# EAGLE board Current (EAGLE 7.5.0)
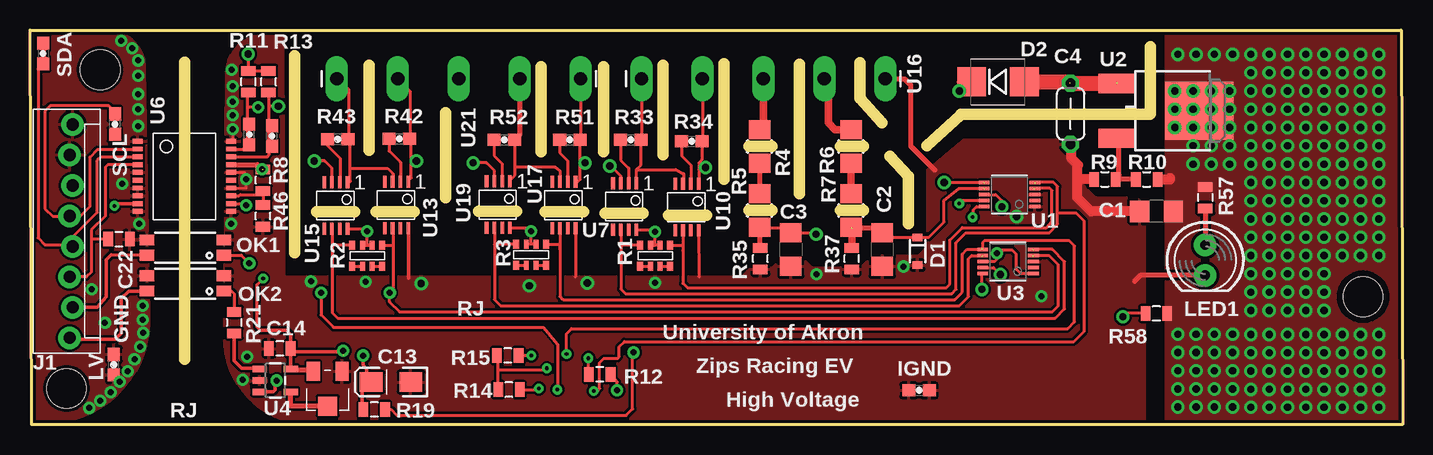
[diagram p0: board, top side]
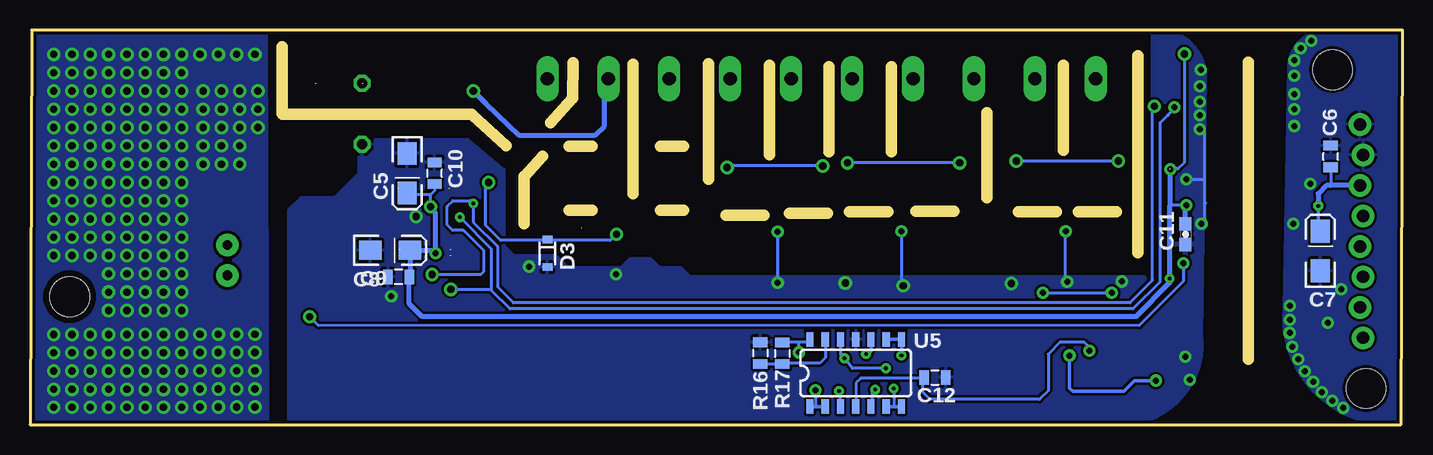
[diagram p1: board, bottom side, seen from below]

Size 114.43 x 32.89 mm. Coordinates in mm from the lower left corner, seen from the top.
Outline: 12.88,30.23 12.88,5.46
Outline: 23.88,17.73 27.05,17.73
Outline: 28.85,17.75 32.03,17.75
Outline: 37.39,17.78 40.56,17.78
Outline: 42.93,17.75 46.13,17.75
Outline: 47.93,17.63 51.1,17.63
Outline: 53.24,17.48 56.41,17.48
Outline: 28.27,22.86 28.27,29.97
Outline: 34.65,18.9 34.65,26.01
Outline: 42.62,22.73 42.62,29.84
Outline: 47.83,22.73 47.83,29.84
Outline: 52.78,22.48 52.78,29.97
Outline: 57.86,20.45 57.86,30.1
Outline: 61.85,23.19 59.94,23.19
Outline: 61.85,17.86 59.94,17.86
Outline: 69.47,23.19 67.56,23.19
Outline: 69.47,17.86 67.56,17.86
Outline: 22.07,14.35 22.07,30.73
Outline: 93.34,25.86 77.6,25.86
Outline: 93.4,31.5 93.4,25.91
Outline: 74.75,23.24 77.55,25.78
Outline: 64.16,19.24 64.16,30.05
Outline: 73.23,16.76 73.23,20.7
Outline: 73.22,20.71 71.69,22.36
Outline: 71.03,25.16 69.23,27.16
Outline: 69.18,30.16 69.2,27.22
Outline: 114.3,32.89 114.43,0 0.13,0 0,32.89 114.3,32.89
Copper layers (1*16): Top 0.035mm / dielectric 1.5mm / Bottom 0.035mm
Design rules "SparkFun *": minimum track width 7mil, minimum drill 12mil, track to track 8mil, track to pad 8mil, pad to pad 8mil, via to via 8mil, smd to smd 8mil, copper to edge 10mil, drill to drill 8mil, minimum pad ring 12mil, minimum via ring 10mil, stop-mask expansion 4mil, vias tented up to drill 25mil, thermal gap 10mil

## Footprints (pad centres in the part's own frame; a part is rotated, then mirrored left to right if it is on the bottom)
1206@1 = smd 1.6 x 1.8: 1 -1.4,0; 2 1.4,0
C_TH_05-02 = drill 0.813 octagon: 1 -2.54,0; 2 2.54,0
EIA3216-16V = smd 1.9 x 1.6: A 1.65,0; C -1.65,0
0805 = smd 0.8 x 1.2: 1 -0.9,0; 2 0.9,0
0603 = smd 1.1 x 1: 1 -0.85,0; 2 0.85,0
SOD-323 = smd 0.63 x 0.83: A 1.15,0; C -1.15,0
SMB = smd 2.4 x 2.4: A 2.2,0; C -2.2,0
MOLEX-1X8-2 = drill 1.016 pad 1.88: 1 -8.89,0; 2 -6.35,-0.254; 3 -3.81,0; 4 -1.27,-0.254; 5 1.27,0; 6 3.81,-0.254; 7 6.35,0; 8 8.89,-0.254
LED5MM = drill 0.813 pad 1.88: A -1.27,0; K 1.27,0
SOP-4 = smd 1.2 x 0.9: 1 -3.2,0.67; 2 -3.2,-0.6; 3 3.2,-0.6; 4 3.2,0.67
22AR100KLFTR = smd 1.092 x 1.6: 1 1.194,-1.448; 3 -1.194,-1.448 | smd 1.6 x 1.6: 2 0,1.448
MNR14 = smd 0.5 x 0.75: 1 -1.25,-0.9; 4 1.25,-0.9; 5 1.25,0.85; 8 -1.25,0.85 | smd 0.4 x 0.75: 2 -0.4,-0.9; 3 0.4,-0.9; 6 0.4,0.85; 7 -0.4,0.85
1206 = smd 1.6 x 1.8: 1 -1.4,0; 2 1.4,0
STAND-OFF = hole 3.302: 0,0
MSOP-10 = smd 0.305 x 0.889: 1 -1,-2.11; 2 -0.5,-2.11; 3 0,-2.11; 4 0.5,-2.11; 5 1,-2.11; 6 1,2.11; 7 0.5,2.11; 8 0,2.11; 9 -0.5,2.11; 10 -1,2.11
DPAK = smd 1.6 x 3: 1 -2.28,-4.04; 3 2.28,-4.04 | smd 4.826 x 5.715: 2 0,2.858
SOT23-5 = smd 0.55 x 1.2: 1 -0.95,-1.3; 2 0,-1.3; 3 0.95,-1.3; 4 0.95,1.3; 5 -0.95,1.3
SO-14 = smd 0.6 x 1.2: 1 -3.81,-2.8; 2 -2.54,-2.8; 3 -1.27,-2.8; 4 0,-2.8; 5 1.27,-2.8; 6 2.54,-2.8; 7 3.81,-2.8; 8 3.81,2.8; 9 2.54,2.8; 10 1.27,2.8; 11 0,2.8; 12 -1.27,2.8; 13 -2.54,2.8; 14 -3.81,2.8
SSOP-20 = smd 0.813 x 0.406: 1 -3.9,2.925; 2 -3.9,2.275; 3 -3.9,1.625; 4 -3.9,0.975; 5 -3.9,0.325; 6 -3.9,-0.325; 7 -3.9,-0.975; 8 -3.9,-1.625; 9 -3.9,-2.275; 10 -3.9,-2.925; 11 3.9,-2.925; 12 3.9,-2.275; 13 3.9,-1.625; 14 3.9,-0.975; 15 3.9,-0.325; 16 3.9,0.325; 17 3.9,0.975; 18 3.9,1.625; 19 3.9,2.275; 20 3.9,2.925
MSOP-8 = smd 0.3 x 1: 1 -0.975,-1.95; 2 -0.325,-1.95; 3 0.325,-1.95; 4 0.975,-1.95; 5 0.975,1.925; 6 0.325,1.925; 7 -0.325,1.925; 8 -0.975,1.925
1X9_0.1_SP = drill 1.118 pad 1.88 long: 1 -10.16,0; 3 -5.08,0; 5 0,0; 7 5.08,0; 9 10.16,0

## Placement (x,y rotation side)
C1  10UF  [1206@1]  93.9,17.78 180 top
C2  10UF  [1206@1]  71.04,14.61 270 top
C3  10UF  [1206@1]  63.42,14.61 270 top
C4  0.47UF  [C_TH_05-02]  86.74,25.91 270 top
C5  10UF  [EIA3216-16V]  82.98,20.95 270 bottom
C6  0.1UF  [0805]  5.99,22.35 90 bottom
C7  10UF  [EIA3216-16V]  6.86,14.48 90 bottom
C8  0.1UF  [0805]  83.69,12.32 180 bottom
C9  10UF  [EIA3216-16V]  84.4,14.53 0 bottom
C10  0.1UF  [0805]  80.7,20.95 90 bottom
C11  0.01UF  [0603]  18.1,15.88 270 bottom
C12  0.1UF  [0805]  38.99,3.94 0 bottom
C13  10UF  [EIA3216-16V]  30.1,3.56 180 top
C14  0.1UF  [0805]  20.83,6.35 180 top
C22  0.1UF  [0805]  7.42,15.47 0 top
D1  3.3V  [SOD-323]  73.99,14.45 270 top
D2  DIODE-ZENER_56V  [SMB]  80.7,28.57 0 top
D3  3.3V  [SOD-323]  71.3,14.27 270 bottom
GND  TPSMD  [0603]  6.99,5 90 top
IGND  TPSMD  [0603]  74.12,2.87 0 top
ISCL  TPSMD  [0603]  18.29,24.18 90 top
ISDA  TPSMD  [0603]  20.17,24.05 90 top
J1  M80022232081-2  [MOLEX-1X8-2]  3.3,16.13 90 top
LED1  [LED5MM]  97.97,13.72 270 top
OK1  TCMT1103  [SOP-4]  12.95,14.8 180 top
OK2  TCMT1103  [SOP-4]  12.95,11.81 180 top
POT1  22AR100KLFTR  [22AR100KLFTR]  24.82,3 180 top
R1  100K  [MNR14]  52.12,14.1 0 top
R2  100K  [MNR14]  28.12,14.1 0 top
R3  100K  [MNR14]  41.78,14.2 0 top
R4  174k  [1206]  60.83,23.18 90 top
R5  174k  [1206]  60.83,17.84 90 top
R6  174k  [1206]  68.45,23.18 90 top
R7  174k  [1206]  68.45,17.84 90 top
R8  30.9K  [0805]  19.43,20.38 90 top
R9  18.2K  [0805]  89.6,20.45 0 top
R10  6.04k  [0805]  93.09,20.45 0 top
R11  2.2K  [0805]  18.21,28.57 90 top
R12  1K  [0805]  47.5,4.19 180 top
R13  2.2K  [0805]  19.89,28.57 90 top
R14  1K  [0805]  39.93,2.92 180 top
R15  1K  [0805]  39.83,5.77 180 top
R16  1K  [0805]  53.54,5.97 270 bottom
R17  2.2K  [0805]  51.71,5.94 270 bottom
R19  10K  [0805]  28.7,1.27 180 top
R21  1K  [0805]  17.02,8.51 270 top
R33  4.99K  [0603]  50.09,23.75 0 top
R34  4.99K  [0603]  55.17,23.62 0 top
R35  2.2K  [0805]  60.88,13.84 90 top
R37  2.2K  [0805]  68.5,13.84 90 top
R42  4.99K  [0603]  30.78,23.83 0 top
R43  4.99K  [0603]  25.65,23.8 0 top
R46  10K  [0805]  19.43,17.4 90 top
R51  4.99K  [0603]  45.01,23.75 0 top
R52  4.99K  [0603]  39.55,23.75 0 top
R57  1K  [0805]  97.97,18.92 270 top
R58  1K  [0805]  93.9,9.27 180 top
SCL  TPSMD  [0603]  7.09,25.04 90 top
SDA  TPSMD  [0603]  1.09,30.94 270 top
STANDOFF1  STAND-OFF  [STAND-OFF]  5.84,29.59 0 top
STANDOFF2  STAND-OFF  [STAND-OFF]  111.12,10.67 0 top
STANDOFF3  STAND-OFF  [STAND-OFF]  3.05,3.02 0 top
U1  ADS1015  [MSOP-10]  81.66,19.18 90 top
U2  LR8  [DPAK]  94.61,26.16 270 top
U3  ADS1015  [MSOP-10]  81.53,13.59 90 top
U4  OPA344  [SOT23-5]  20.45,3.68 270 top
U5  MCP6L04  [SO-14]  45.59,4.32 0 bottom
U6  ADM3260ARSZ-RL7  [SSOP-20]  12.88,20.7 0 top
U7  HV7802  [MSOP-8]  49.58,18.19 180 top
U10  HV7802  [MSOP-8]  54.76,18.11 180 top
U13  HV7802  [MSOP-8]  30.56,18.31 180 top
U15  HV7802  [MSOP-8]  25.5,18.26 180 top
U16  M5_0.2_ISO  [1X9_0.1_SP]  61.14,28.83 0 top
U17  HV7802  [MSOP-8]  44.5,18.29 180 top
U19  HV7802  [MSOP-8]  39.04,18.34 180 top
U21  M5_0.2_ISO  [1X9_0.1_SP]  35.74,28.83 180 top
U$2  LOGO16-M  [2016-LOGO-M]  77.72,1.27 0 top

## Library data of the parts
C1-C3 = FSAE Electric; PARTNO: CL31A106KBHNNNE
C4 = FSAE Electric; PARTNO: RDER72J474MUE1H03A
C5 C7 C9 C13 = FSAE Electric; PARTNO: T491A106M016AT
C6 C8 C10 C12 C14 C22 = FSAE Electric; PARTNO: CC0805ZRY5V9BB104
C11 = FSAE Electric; PARTNO: CC0603KRX7R9BB103
D1 D3 = SparkFun-DiscreteSemi; PROD_ID: DIO-11284
D2 = FSAE Electric; PARTNO: 1SMB5943B-13
GND IGND ISCL ISDA SCL SDA = FSAE Electric; PARTNO: 1625854-3
J1 = FSAE Electric; PARTNO: 0022232081
LED1 = SparkFun-LED
OK1 OK2 = FSAE Electric; PARTNO: TCMT1103
POT1 = FSAE Electric; PARTNO: 22AR100KLFTR
R1-R3 = FSAE Electric; PARTNO: MNR14ERAPJ104
R4-R7 = FSAE Electric; PARTNO: RC1206FR-07174KL
R8 = FSAE Electric; PARTNO: ERJ-6ENF3092V
R9 = FSAE Electric; PARTNO: RC0805FR-0718K2L
R10 = FSAE Electric; PARTNO: RMCF0805FT6K04
R11 R13 R17 R35 R37 = FSAE Electric; PARTNO: RC0805FR-072K2L
R12 R14-R16 R21 R57 R58 = FSAE Electric; PARTNO: RC0805FR-071KL
R19 R46 = FSAE Electric; PARTNO: RC0805FR-0710KL
R33 R34 R42 R43 R51 R52 = FSAE Electric; PARTNO: ERJ-3EKF4991V
STANDOFF1-STANDOFF3 = SparkFun-Electromechanical
U1 U3 = FSAE Electric; PARTNO: ADS1015QDGSRQ1
U2 = FSAE Electric; PARTNO: LR8K4-G
U4 = FSAE Electric; PARTNO: OPA344NA/3K
U5 = FSAE Electric; PARTNO: MCP6L04T-E/SL
U6 = FSAE Electric; PARTNO: ADM3260ARSZ-RL7
U7 U10 U13 U15 U17 U19 = FSAE Electric; PARTNO: HV7802MG-G
U16 U21 = FSAE Electric
U$2 = Pic

## Nets
5V: C1.1 R10.2 R57.1 R58.1 U2.2
+3V3: C22.1 J1.3 U6.4
+5V: C6.1 C7.A J1.6 U6.9
CRNT1A: R1.8 U1.5 U5.3 U7.6
CRNT1B: R1.5 U1.4 U10.6
CRNT2A: R2.5 U3.4 U5.5 U13.6
CRNT2B: R2.8 U3.5 U15.6
CRNT3A: R3.5 U3.6 U5.10 U17.6
CRNT3B: R3.8 U3.7 U19.6
GND: C6.2 C7.C C22.2 GND.1 GND.2 J1.7 J1.8 OK1.3 OK2.3 U6.1 U6.5 U6.7 U6.8 U6.10
HV+: C4.1 D2.A U2.1
N$1: R3.3 R3.4
N$2: R3.1 R3.2
N$3: R2.3 R2.4
N$4: R2.1 R2.2
N$5: R1.1 R1.2
N$6: R1.3 R1.4
N$7: J1.4 SDA.1 SDA.2 U6.3
N$8: J1.5 SCL.1 SCL.2 U6.2
N$9: R4.1 R5.2
N$10: R6.1 R7.2
N$11: R12.2 R14.2 R15.2 U5.12
N$12: R16.2 R17.2 U5.13
N$13: R17.1 R19.1 U5.14
N$14: C13.A R19.2 U4.3
N$15: OK2.1 R21.1
N$16: R15.1 U5.8 U5.9
N$17: R14.1 U5.6 U5.7
N$18: POT1.2 U4.4
N$19: R21.2 U4.1
N$21: R12.1 U5.1 U5.2
N$22: J1.1 OK2.4
N$23: R9.2 R10.1 U2.3
N$24: C5.A C8.1 C9.A C10.1 C11.1 C12.1 C14.1 POT1.1 R8.2 R11.2 R13.2 U1.8 U3.1 U3.8 U4.5 U5.4 U6.12 U6.17
N$31: D2.C R6.2 U16.7
N$32: R33.2 U7.1 U10.3 U16.1
N$33: C3.1 D3.C R5.1 R35.2 U1.6
N$34: R34.2 U7.3 U10.1 U16.3
N$35: R4.2 U16.5
N$36: R33.1 U7.2
N$37: R34.1 U10.2
N$39: LED1.A R57.2
N$51: R43.2 U13.3 U15.1 U21.9
N$52: R42.1 U13.2
N$53: C2.1 D1.C R7.1 R37.2 U1.7
N$55: R43.1 U15.2
N$56: R42.2 U13.1 U15.3 U21.7
N$57: OK1.1 R58.2
N$64: R52.2 U17.3 U19.1 U21.3
N$65: R51.1 U17.2
N$66: R52.1 U19.2
N$67: R51.2 U17.1 U19.3 U21.1
N$71: ISCL.1 ISCL.2 R11.1 U1.10 U3.10 U6.19
N$72: ISDA.1 ISDA.2 R13.1 U1.9 U3.9 U6.18
N$73: R8.1 R46.2 U6.13
TSAL_EN: J1.2 OK1.4
V-: C1.2 C2.2 C3.2 C4.2 C5.C C8.2 C9.C C10.2 C11.2 C12.2 C13.C C14.2 D1.A D3.A IGND.1 IGND.2 LED1.K OK1.2 OK2.2 POT1.3 R1.6 R1.7 R2.6 R2.7 R3.6 R3.7 R9.1 R16.1 R35.1 R37.1 R46.1 U1.1 U1.3 U3.3 U4.2 U5.11 U6.11 U6.14 U6.16 U6.20 U7.8 U10.8 U13.8 U15.8 U16.9 U17.8 U19.8

## Tracks (layer width: path | path; a pad name or v marks a point on that pad's centre or on a via)
5V  (via drill 0.6)
  Top 0.813: R10.2 95.06,20.45 95.06,20.57
  other vias: 95.68,30.86 97.21,30.86 98.73,30.86 100.25,30.86 107.87,9.53 107.87,11.05 107.87,12.57 107.87,14.1 107.87,15.62 107.87,17.14 107.87,18.67 109.4,14.1 109.4,15.62 109.4,17.14 109.4,18.67 112.45,14.1 112.45,15.62 112.45,17.14 112.45,18.67 110.92,14.1 110.92,15.62 110.92,17.14 110.92,18.67 112.45,20.19 112.45,21.72 112.45,23.24 112.45,24.77 110.92,20.19 110.92,21.72 110.92,23.24 110.92,24.77 109.4,20.19 109.4,21.72 109.4,23.24 109.4,24.77 107.87,20.19 107.87,21.72 107.87,23.24 107.87,24.77 106.35,20.19 106.35,21.72 106.35,23.24 106.35,24.77 104.83,20.19 104.83,21.72 104.83,23.24 104.83,24.77 103.3,20.19 103.3,21.72 103.3,23.24 103.3,24.77 101.78,20.19 101.78,21.72 101.78,23.24 101.78,24.77 112.45,26.29 112.45,27.81 112.45,29.34 112.45,30.86 110.92,26.29 110.92,27.81 110.92,29.34 110.92,30.86 109.4,26.29 109.4,27.81 109.4,29.34 109.4,30.86 107.87,26.29 107.87,27.81 107.87,29.34 107.87,30.86 106.35,26.29 106.35,27.81 106.35,29.34 106.35,30.86 104.83,26.29 104.83,27.81 104.83,29.34 104.83,30.86 103.3,26.29 103.3,27.81 103.3,29.34 103.3,30.86 101.78,26.29 101.78,27.81 101.78,29.34 101.78,30.86 101.78,9.53 101.78,11.05 101.78,12.57 101.78,14.1 101.78,15.62 101.78,17.14 101.78,18.67 103.3,14.1 103.3,15.62 103.3,17.14 103.3,18.67 103.3,9.53 103.3,11.05 103.3,12.57 104.83,9.53 104.83,11.05 104.83,12.57 104.83,14.1 104.83,15.62 104.83,17.14 104.83,18.67 106.35,14.1 106.35,15.62 106.35,17.14 106.35,18.67 106.35,9.53 106.35,11.05 106.35,12.57 95.43,27.81 96.95,27.81 98.48,27.81 100,27.81 95.43,26.29 96.95,26.29 98.48,26.29 100,26.29 95.43,24.77 96.95,24.77 98.48,24.77 100,24.77 96.95,23.24 98.48,23.24 100,23.24 96.95,21.72 98.48,21.72 100,21.72 95.68,6.02 95.68,7.54 97.21,6.02 97.21,7.54 95.68,2.97 95.68,4.5 97.21,2.97 97.21,4.5 95.68,1.47 97.21,1.47 98.73,6.02 98.73,7.54 100.25,6.02 100.25,7.54 98.73,2.97 98.73,4.5 100.25,2.97 100.25,4.5 98.73,1.47 100.25,1.47 107.87,2.95 107.87,4.47 109.4,2.95 109.4,4.47 112.45,2.95 112.45,4.47 110.92,2.95 110.92,4.47 101.78,2.95 101.78,4.47 103.3,2.95 103.3,4.47 104.83,2.95 104.83,4.47 106.35,2.95 106.35,4.47 107.87,5.99 107.87,7.52 109.4,5.99 109.4,7.52 112.45,5.99 112.45,7.52 110.92,5.99 110.92,7.52 101.78,5.99 101.78,7.52 103.3,5.99 103.3,7.52 104.83,5.99 104.83,7.52 106.35,5.99 106.35,7.52 107.87,1.45 109.4,1.45 112.45,1.45 110.92,1.45 101.78,1.45 103.3,1.45 104.83,1.45 106.35,1.45
  pour Top (isolate 0.254, no thermals): 94.79,32.64 114.3,32.89 114.3,0 94.79,0
  pour Bottom (isolate 0.254): 94.79,32.64 114.3,32.89 114.17,0 94.67,0
+3V3
  Top 0.254: U6.4 6.49,21.68 6.27,21.46 6.27,17.37 5.11,16.23 5.11,15.42 | 5.11,15.42 5.11,12.73 4.7,12.32 J1.3 | C22.1 5.16,15.47 5.11,15.42
+5V  (via drill 0.3)
  Top 0.305: U6.9 7.22,18.43 v7.04,18.24
  Top 0.406: 7.06,18.26 v7.04,18.24
  Bottom 0.254: C6.1 5.99,19.99 6.04,19.94
  Bottom 0.305: v7.04,18.24 7.04,16.71 C7.A
  Bottom 0.406: J1.6 6.04,19.94 6.35,19.94 7.04,19.25 v7.04,18.24
CRNT1A  (via drill 0.3)  (1 unrouted)
  Top 0.254: 85.65,17.58 85.65,16.71 84.96,15.98 78,15.98 77.19,15.16 77.19,11.28 76.83,10.92 49.63,10.92 49.26,11.3 49.26,14.96 | 85.65,17.58 85.65,19.86 85.32,20.19 83.71,20.19 | v46.99,2.82 47.3,2.82 47.5,3.02 47.5,5.18 47.85,5.54 49,5.54 49.12,5.66 49.12,6.5 49.55,6.93 87.02,6.91 87.88,7.77 87.88,16.97 87.25,17.6 85.67,17.6 85.65,17.58 | U7.6 49.26,14.96 | R1.8 49.27,14.95 49.26,14.96
  Bottom 0.254: U5.3 46.86,2.69 v46.99,2.82
CRNT1B  (1 unrouted)
  Top 0.254: 54.44,14.53 U10.6 54.45,14.89 | 54.45,14.89 54.44,11.78 54.81,11.41 76.38,11.41 76.68,11.71 76.68,15.39 77.72,16.43 84.73,16.43 85.19,16.94 85.19,19.53 85.04,19.68 83.7,19.68 | R1.5 54.38,14.95 54.45,14.89
CRNT2A  (via drill 0.3, 0.5)  (1 unrouted)
  Top 0.254: U13.6 30.28,15.96 30.28,14.93 | 83.58,14.1 84.96,14.1 85.72,13.34 85.72,9.91 85.22,9.4 30.81,9.4 30,10.21 v30,11 30.28,11.28 30.28,14.93 | v24.26,11 24.26,9.14 25.3,8.1 42.8,8.1 43.97,6.71 v43.97,2.92 | R2.5 30.27,14.95 30.28,14.93
  Bottom 0.254: v30,11 v24.26,11 | v43.97,2.92 44.22,2.67 44.22,1.62 U5.5
CRNT2B  (1 unrouted)
  Top 0.254: U15.6 25.2,15.96 25.2,14.91 | 83.58,14.61 85.22,14.61 86.23,13.59 86.23,9.65 85.47,8.89 25.63,8.89 25.2,9.32 25.2,14.91 | R2.8 25.23,14.95 25.2,14.91
CRNT3A  (via drill 0.3)  (1 unrouted)
  Top 0.254: U17.6 44.18,14.59 | 44.18,14.59 44.17,14.99 43.23,14.99 R3.5 | 44.18,14.59 44.18,10.69 44.45,10.41 77.09,10.41 77.72,11.05 77.72,14.22 78.11,14.61 79.33,14.61 | v44.73,5.89 44.73,7.59 45.14,8 86.51,8 87.07,8.56 87.07,14.91 86.64,15.34 79.58,15.34 79.4,15.16 79.4,14.61 U3.6
  Bottom 0.254: U5.10 44.32,6.07 44.5,5.89 v44.73,5.89
CRNT3B  (1 unrouted)
  Top 0.254: 79.34,14.1 78.49,14.1 78.23,13.84 78.23,10.67 77.47,9.91 39.24,9.91 38.72,10.43 38.72,15.01 | U19.6 38.72,15.01 | R3.8 38.75,15.05 38.72,15.01
GND  (via drill 0.5)
  other vias: 9.02,24.89 9.02,26.29 9.02,27.56 9.02,29.08 9.02,30.35 8.51,31.37 7.62,32 9.12,16.74 9.4,9.91 9.4,8.76 9.42,7.65 9.19,6.5 8.71,5.46 8.15,4.47 7.47,3.58 6.73,2.72 5.87,2.01 4.95,1.4 7.7,20.07 6.25,8.48 5.13,11.3
  pour Top: 0,32.89 6.35,32.89 arc-90 9.53,29.72 9.91,9.15 arc-92 1.36,0.12 0,-0.13
  pour Bottom: 0,32.89 6.35,32.89 arc-90 9.53,29.72 9.92,9.65 arc-93 1.26,0.08 -0.13,0
HV+  (2 unrouted)
  Top 1.27: D2.A 86.54,28.57 86.67,28.45 90.66,28.45
N$1
  Top 0.254: R3.3 R3.4
N$2
  Top 0.254: R3.1 R3.2
N$3
  Top 0.254: R2.3 R2.4
N$4
  Top 0.254: R2.1 R2.2
N$5
  Top 0.254: R1.1 R1.2
N$6
  Top 0.254: R1.3 R1.4
N$7
  Top 0.254: U6.3 5.92,22.33 5.61,22.02 5.61,17.7 3.56,15.65 J1.4 3.4,15.01 1.25,15.01 0.69,15.57 0.69,29.64 1.09,30.05 SDA.2
  Top 0.406: SDA.1 SDA.2
N$8
  Top 0.254: U6.2 8.94,22.94 5.64,22.94 5,22.3 5,18.19 4.22,17.4 J1.5 3.28,17.37 1.88,17.37 1.25,18.01 1.25,26.11 1.7,26.57 6.58,26.57 7.06,26.06 SCL.1 SCL.2
N$9
  Top 0.406: R4.1 60.83,19.3 | 60.83,19.3 60.64,19.11 | 60.83,19.3 60.96,19.43 60.96,19.37 R5.2
N$10
  Top 0.61: R6.1 68.45,19.49 68.52,19.43 68.45,19.43 68.33,19.3 68.39,19.3 R7.2
N$11  (via drill 0.3)
  Top 0.254: R15.2 39.03,6.02 R14.2 39.03,4.56 39.01,4.57 42.8,4.57 v43.08,4.7 | v46.53,5.54 46.53,4.16 R12.2
  Bottom 0.254: U5.12 46.86,5.87 v46.53,5.54 45.87,4.7 v43.08,4.7
N$12
  Bottom 0.254: U5.13 48.13,5.59 48.59,5.13 51.37,5.13 R17.2 53.26,5.04 R16.2
N$13  (via drill 0.5)
  Top 0.254: R19.1 30.1,1.27 30.58,0.79 49.71,0.79 50.24,1.32 50.24,5.94 v50.32,6.02
  Bottom 0.254: U5.14 49.4,6.96 49.48,6.88 50.39,6.88 | 50.39,6.88 51.42,6.88 R17.1 | v50.32,6.02 50.32,6.81 50.39,6.88
N$14  (via drill 0.5)
  Top 0.305: U4.3 20.26,2.73 20.45,2.92 20.45,3.56 v20.57,3.68 | R19.2 27.69,1.39 27.69,3.3 27.94,3.56 C13.A 28.07,3.94 28.07,4.57 27.76,5 v27.76,5.77
  Bottom 0.305: v20.57,3.68 22.35,3.68 23.24,2.79 27.51,2.79 27.76,3.05 v27.76,5.77
N$15
  Top 0.254: OK2.1 16.8,11.14 17.02,10.92 R21.1
N$16  (via drill 0.3)
  Top 0.254: v41.78,5.77 R15.1
  Bottom 0.254: U5.8 v41.78,5.77
  Bottom 0.305: U5.8 U5.9
N$17  (via drill 0.3)
  Top 0.254: R14.1 42.32,2.92 v42.42,3.02
  Bottom 0.254: v42.42,3.02 42.42,1.59 42.34,1.52
  Bottom 0.305: U5.7 42.34,1.52 U5.6
N$18
  Top 0.406: POT1.2 21.75,1.55 U4.4
N$19
  Top 0.305: R21.2 17.02,5.33 17.65,4.7 19.08,4.7 U4.1
N$21  (via drill 0.5)
  Top 0.254: v48.95,2.87 48.95,3.54 R12.1
  Bottom 0.254: U5.2 48.79,1.52 48.92,1.65 48.92,2.77 v48.95,2.87
  Bottom 0.305: U5.1 U5.2
N$22
  Top 0.305: OK2.4 8.22,11.14 7.62,10.54 7.62,7.62 7.11,7.11 3.43,7.11 J1.1
N$23
  Top 0.406: 90.42,24 90.78,23.65 90.78,20.8 90.74,20.76 90.68,20.76 | 90.42,24 90.3,24 | 90.42,24 90.57,24 U2.3 | 90.68,20.76 90.56,20.76 R9.2 | R10.1 90.68,20.45 90.68,20.76
N$24  (via drill 0.3, 0.5, 0.6)  (2 unrouted)
  Top 0.254: v81.03,18.16 81.03,18.67 80.52,19.18 U1.8 | R13.2 R11.2 18.21,30.79 v18.19,30.89 | U6.17 16.85,21.68 16.89,21.72 | U6.12 17.77,18.43 v18.03,18.29 | U3.8 80.42,13.59 80.64,13.82 80.64,14.25 v80.62,14.3 80.85,14.53 81.92,14.53 82.22,14.22 82.22,12.95 82.58,12.59 U3.1 | 19.18,7.87 18.92,8.13 18.92,11.68 v19.43,12.19 | 26.09,5.84 v26.11,6.17 | 19.17,21.48 19.17,21.37 v19.36,21.29
  Top 0.305: U4.5 21.75,6.33 C14.1 | C14.1 21.73,7.48 21.34,7.87 19.18,7.87 | 26.09,5.79 26.09,6.1 21.98,6.1 C14.1
  Top 0.406: U6.17 18.98,21.68 19.17,21.48 | v19.36,21.29 19.3,21.21 19.25,21.26 | POT1.1 23.44,4.45 23.44,4.55 21.75,4.55 U4.5
  Bottom 0.254: C10.1 80.7,19.51 81.03,19.18 | 81.03,19.18 82.6,19.18 C5.A | v81.03,18.16 81.03,19.18 | v18.19,30.89 18.19,21.84 18.72,21.31 19.23,21.31 v19.36,21.29 | v18.03,18.29 19.38,18.29 19.43,18.24 | 39.98,3.89 39.93,3.94 C12.1 39.98,3.85 39.98,2.69 39.4,2.11 30.28,2.11 29.54,2.85 29.54,5.89 28.57,6.86 26.52,6.86 26.11,6.45 v26.11,6.17 | 39.98,3.89 39.93,3.89 | 39.98,3.89 45.16,3.89 45.57,3.48 45.57,1.54 U5.4
  Bottom 0.406: v81.03,18.16 80.62,17.65 v80.62,14.3 80.85,14.53 C9.A 82.75,12.36 C8.1 82.7,12.23 82.7,12.17 82.8,12.07 82.8,10.08 81.74,9.02 22.23,9.02 19.43,11.81 v19.43,12.19 19.43,18.24 | C11.1 18.1,18.22 v18.03,18.29 | 19.38,18.29 19.38,21.16 v19.36,21.29
N$31  (via drill 0.6)
  Top 0.406: D2.C 77.47,28.57 v77.47,27.81
  Top 0.61: U16.7 66.55,28.5 66.55,25.15 67.12,24.58 R6.2
  Bottom 0.406: v77.47,27.81 76.45,26.8 73.66,24.13 67.31,24.13 66.55,24.89 66.55,28.5 U16.7
N$32
  Top 0.254: U16.1 50.98,23.79 R33.2 50.93,23.74 50.93,21.64 50.56,21.27 U7.1 50.56,21.19 50.62,21.26 53.85,21.26 54.48,20.93 54.48,19.73 U10.3
N$33  (via drill 0.6)  (1 unrouted)
  Top 0.254: v65.53,15.88 65.4,16 C3.1 63.42,16.2 63.25,16.38 61.01,16.38 | v76.2,20.19 79.46,20.19
  Top 0.406: R5.1 60.83,16.26 | 60.83,16.26 60.83,14.79 R35.2 | 61.01,16.38 60.96,16.38 60.83,16.26
  Bottom 0.254: v65.53,15.88 66.04,15.37 71.35,15.37 | 71.35,15.37 75.18,15.37 76.45,16.64 76.45,19.94 v76.2,20.19 | D3.C 71.35,15.37
N$34  (via drill 0.6)
  Top 0.254: 55.75,21.26 55.75,21.82 56.02,22.08 R34.2 56.06,23.66 U16.3 | 55.75,21.26 55.75,19.82 U10.1 | U7.3 49.26,20.72 48.69,21.29 v48.34,21.56 | v56.31,21.44 55.8,21.44 55.75,21.26
  Bottom 0.254: v48.34,21.56 56.19,21.56 v56.31,21.44
N$35
  Top 0.406: 60.83,24.69 R4.2
  Top 0.61: U16.5 61.14,25.07 60.83,24.77 60.83,24.69
N$36
  Top 0.254: R33.1 49.24,22.06 49.91,21.39 49.91,19.81 U7.2
N$37
  Top 0.254: R34.1 54.32,22.41 55.09,21.64 55.09,19.78 U10.2
N$39
  Top 0.406: R57.2 LED1.A
N$51
  Top 0.254: U21.9 25.68,28.83 26.54,27.96 26.54,23.95 26.59,23.9 26.59,23.89 R43.2 26.7,23.61 26.7,20.29 26.48,20.08 U15.1 26.48,20.05 26.7,20.27 26.7,21.26 26.8,21.36 29.79,21.36 30.25,20.9 30.25,20 | 30.25,19.96 30.25,20 | 30.25,20 U13.3
N$52
  Top 0.254: R42.1 29.93,22.82 30.89,21.87 30.89,19.88 U13.2
N$53  (2 unrouted)
  Top 0.254: 71.37,15.62 74.07,15.62 | 74.07,15.62 74.93,15.62 76.2,16.89 76.2,18.67 77.47,19.68 79.47,19.68 | D1.C 74.05,15.6 74.07,15.62
  Top 0.406: 68.5,16.38 70.87,16.38 70.87,16 C2.1 71.37,16 71.37,15.62
  Top 0.61: 68.5,16.38 68.5,14.91 68.39,14.8 68.45,14.8 R37.2
N$55
  Top 0.254: R43.1 24.8,23.25 25.86,22.2 25.86,19.89 U15.2
N$56  (via drill 0.6)
  Top 0.254: U21.7 30.66,28.8 31.67,27.79 31.67,23.86 R42.2 31.77,23.68 31.77,22.07 | U13.1 31.56,20.36 31.77,20.57 31.77,22.07 | U15.3 25.18,21.38 24.56,22 23.75,22 v23.7,21.97 | v32.21,21.97 31.8,21.97 31.77,22.07
  Bottom 0.254: v23.7,21.97 v32.21,21.97
N$57  (via drill 0.5, 0.6)
  Top 0.254: R58.2 91.36,9.27 v91.11,8.99 | OK1.1 17.62,14.12 v18.29,13.46
  Bottom 0.254: v91.11,8.99 90.4,8.28 21.97,8.25 18.29,11.94 v18.29,13.46
N$64
  Top 0.254: 40.44,21.49 40.44,23.71 R52.2 | U19.1 40.02,20.38 40.44,20.8 40.44,21.49 | 40.44,21.49 43.74,21.49 44.2,21.11 44.2,19.85 U17.3
  Top 0.406: U21.3 40.82,24.17 R52.2
N$65
  Top 0.254: R51.1 44.16,22.67 44.83,22 44.83,20.06 | 44.83,20.06 44.83,19.91 44.86,20.02 44.83,20.06 | 44.83,20.06 U17.2
N$66
  Top 0.254: R52.1 38.7,22.41 39.37,21.74 39.37,20.17 U19.2
N$67  (via drill 0.6)
  Top 0.254: U17.1 45.48,20.05 45.87,20.45 45.87,21.82 | 45.87,21.82 45.87,23.73 R51.2 45.85,23.76 45.85,23.93 45.9,23.98 U21.1 | U19.3 38.72,21.15 38.05,21.82 v36.93,21.82 | v46.28,21.82 45.87,21.82
  Bottom 0.254: v36.93,21.82 v46.28,21.82
N$71  (via drill 0.3, 0.5, 0.6)
  Top 0.254: U6.19 17.77,22.98 18.16,23.37 | 18.16,23.37 18.16,24.87 | 18.16,24.87 18.16,26.34 | 18.16,26.34 18.16,27.62 R11.1 | v78.59,17.3 78.61,17.32 78.61,17.88 78.91,18.18 U1.10 | v79.35,11.28 79.35,11.53 79.35,12.51 U3.10 | v19.02,26.44 18.21,26.44 18.16,26.34 | ISCL.2 18.29,24.99 18.16,24.87 | 18.16,23.37 18.25,23.37 ISCL.1
  Bottom 0.254: v78.59,17.3 75.97,14.66 75.97,11.28 | 75.97,11.28 75.97,11.2 74.42,9.65 22.48,9.65 20.22,11.91 20.22,25.17 19.63,25.76 v19.02,26.44 | v79.35,11.28 75.97,11.28
N$72  (via drill 0.3, 0.6)
  Top 0.254: U6.18 19.76,22.33 19.94,22.55 19.94,23.42 | 19.94,23.42 19.94,24.92 | 19.94,24.92 19.94,26.54 | 19.94,26.54 19.94,27.62 R13.1 | v80.9,12.52 80.33,13.09 U3.9 | v20.7,26.54 19.94,26.54 | U1.9 77.71,18.68 v77.47,18.44 | ISDA.1 20.15,23.2 19.94,23.42 | ISDA.2 19.95,24.9 19.94,24.92
  Bottom 0.254: v80.9,12.52 76.83,12.52 76.58,12.78 76.58,14.5 78.28,16.2 79.2,16.2 79.65,16.66 79.65,18.19 79.17,18.68 77.71,18.68 v77.47,18.44 77.47,16.89 75.46,14.86 75.46,11.51 74.12,10.16 22.73,10.16 20.85,12.04 20.85,26.39 v20.7,26.54
N$73
  Top 0.254: 19.43,19.3 R46.2 | 19.41,19.33 19.43,19.3 | U6.13 17.43,19.08 17.53,19.18 19.3,19.18 19.43,19.3 | R8.1 19.43,19.3
TSAL_EN
  Top 0.305: OK1.4 6.76,14.15 6.35,13.74 6.35,10.67 5.59,9.78 J1.2
V-  (via drill 0.5, 0.6)
  Top 0.254: U17.8 45.48,12.33 45.47,12.32 | U15.8 27.88,16.34 v28.09,16.13 28.12,16.1 28.12,15.01 28.18,14.95 R2.6 R2.7 | v16.89,24.64 16.89,23.74 U6.20 | U6.11 16.89,17.78 | U6.14 18.03,19.74 v18.03,20.45 18.03,20.83 17.84,21.03 U6.16 | U10.8 55.76,12.36 55.8,12.32 | U19.8 41.5,16.41 v41.78,16.13 41.78,15.06 41.8,15.05 R3.6 R3.7 | 51.74,14.97 R1.7 | R1.6 R1.7 | R1.7 52.08,14.95 52.09,14.96 v52.09,16.08 51.91,16.26 U7.8
  Top 0.305: U13.8 31.55,15.98 31.55,12.22
  Top 0.406: U16.9 72.9,28.83 73.41,28.32 73.41,23.24 75.44,21.21 | LED1.K 92.58,12.45 92.08,11.94
  Top 0.813: 87.38,21.64 87.3,21.72 | 87.3,21.72 86.79,22.22 86.79,23.24 | C1.2 88.44,17.78 87.3,18.92 87.3,20.83 | 87.3,20.83 87.3,21.72 | R9.1 87.43,20.45 87.3,20.83
  Bottom 0.254: 28.09,12.17 28.12,12.27 28.12,16.1 v28.09,16.13 | 16.51,16.89 16.51,18.41 16.51,20.45 | 16.51,20.45 16.51,24.38 v16.89,24.64 | v18.03,20.45 16.51,20.45 | v41.78,16.13 41.78,11.73 v41.63,11.58 | v52.09,16.08 v52.09,11.84
  Bottom 0.305: 16.43,18.5 16.51,18.41
  other vias: 32.61,11.76 27.97,11.91 16.81,29.57 46.46,11.81 65.56,12.52 72.82,13.18 84.3,10.72 23.42,11.94 16.89,25.78 16.89,26.92 16.89,28.19 16.76,16.76 18.11,5.66 17.73,3.76 82.25,17.35
  pour Bottom: 21.13,-0.13 20.75,11.3 21.51,12.32 59.36,12.32 60.12,13.08 61.9,13.08 62.66,13.84 64.44,13.84 65.2,13.08 69.52,13.08 70.54,14.1 74.09,14.1 74.85,14.86 74.85,21.21 77.9,23.75 86.28,23.75 87.05,22.99 87.05,20.95 89.08,18.92 91.87,18.92 92.89,17.91 92.89,0.13
  pour Top: 92.89,0.13 23.65,-0.02 arc-90 16.22,7.22 16.41,29.29 arc-90 19.65,32.51 21.08,32.51 21.13,12.32 59.36,12.32 60.12,13.08 61.9,13.08 62.66,13.84 64.44,13.84 65.2,13.08 69.27,13.08 70.28,14.1 74.09,14.1 74.85,14.86 74.85,21.21 77.9,23.75 86.03,23.75 87.05,22.73 87.05,20.7 88.82,18.92 92.13,18.92 92.89,18.41
  pour Bottom: 16.81,7.49 16.48,28.89 arc-90 20.51,32.89 20.83,32.89 20.83,12.83 21.34,11.81 22.86,0.13 arc-92

## Text on the board
tPlace: University of Akron | LV | Zips Racing EV | High Voltage | RJ
tNames: RJ